# Altium PCB snowflake_r2.PcbDoc (part 1 of 2)
Units mm, origin at the board's own origin, x right, y up, seen from the top; angles counter-clockwise.
Board outline 80 x 69.28 mm, 2 copper layers (Component Side, Bottom Layer), stack 1.554 mm thick; 100 components, 57 nets, 399 pads, 234 vias.
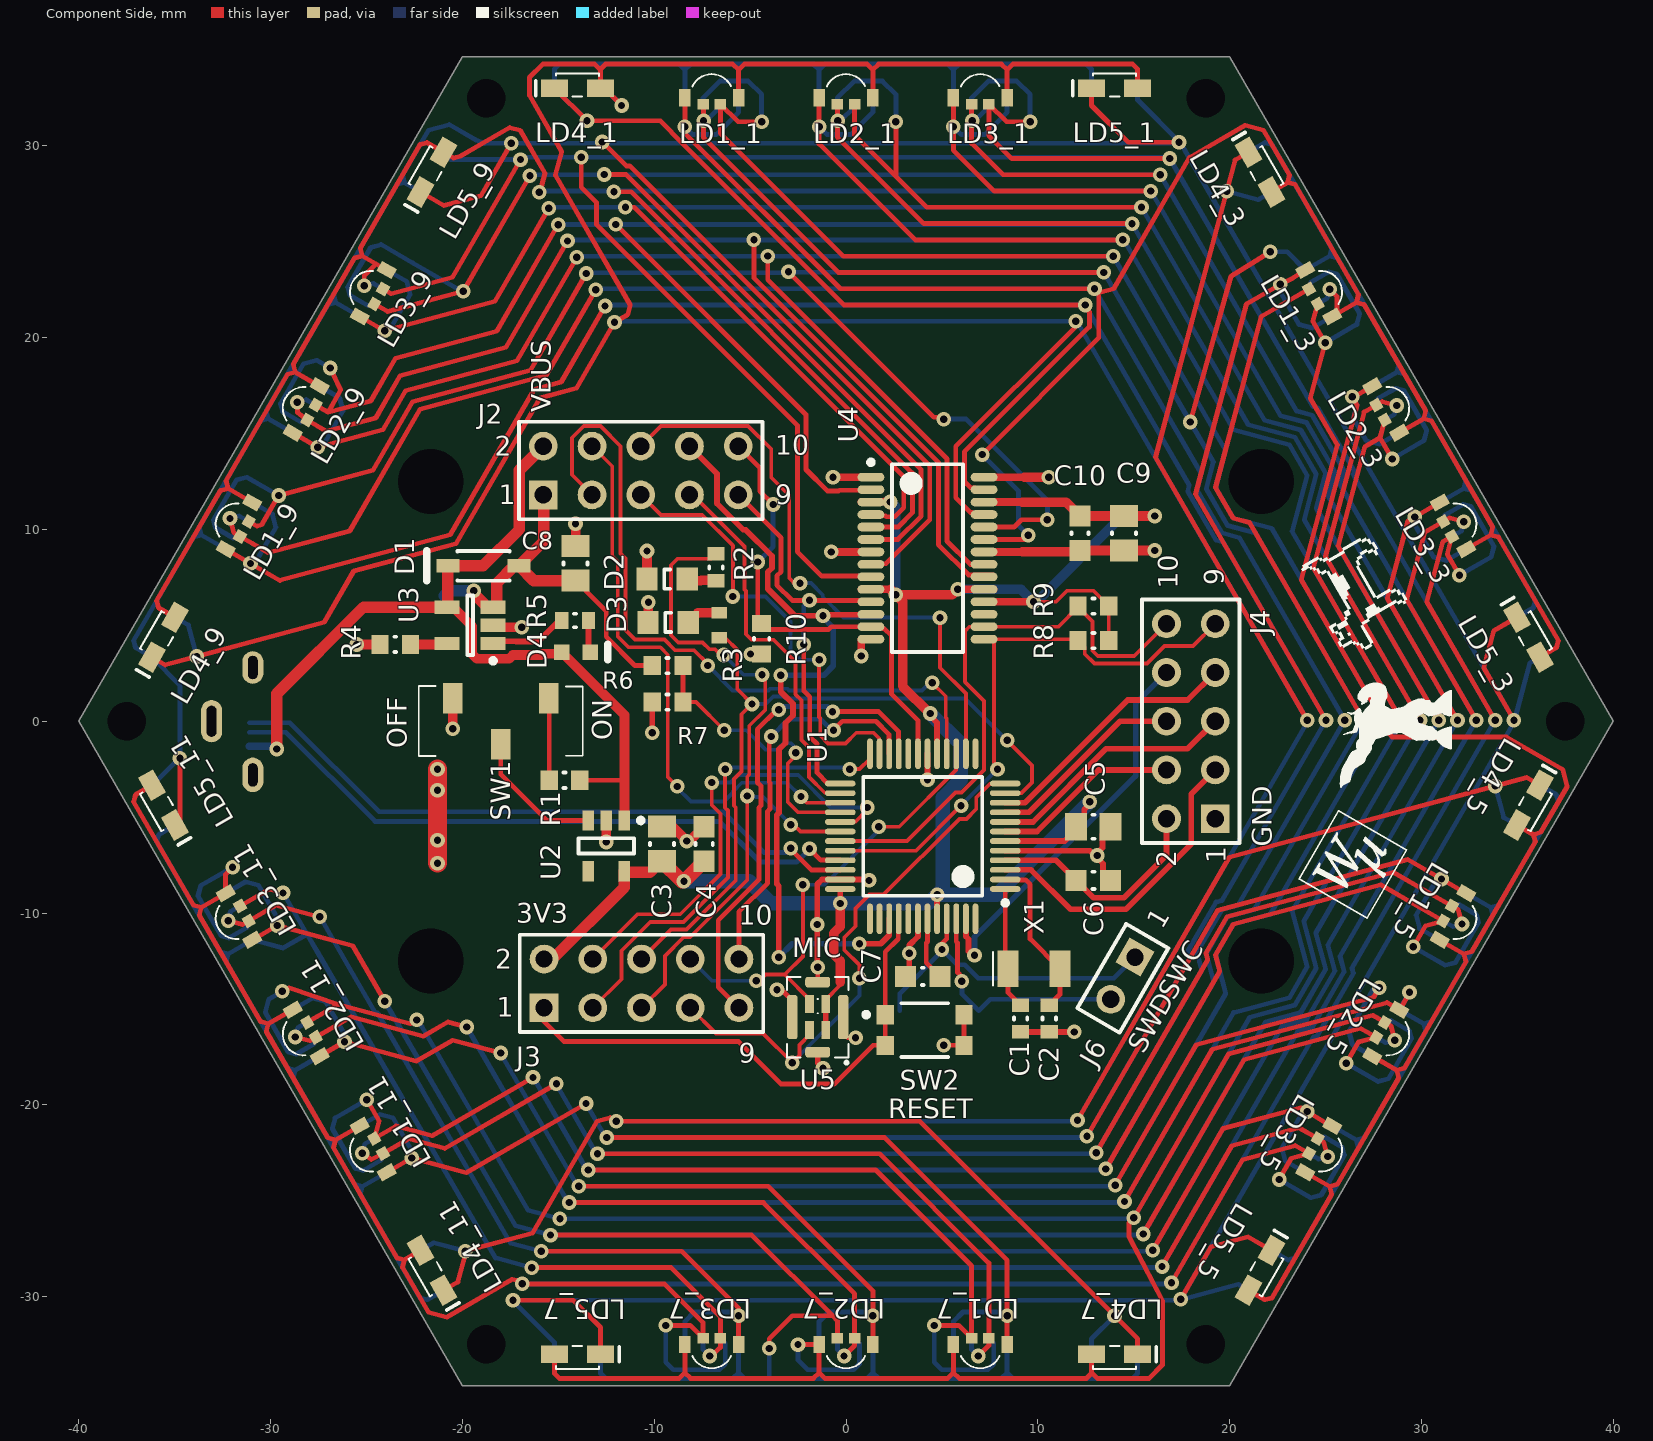
[diagram p0: Component Side view]
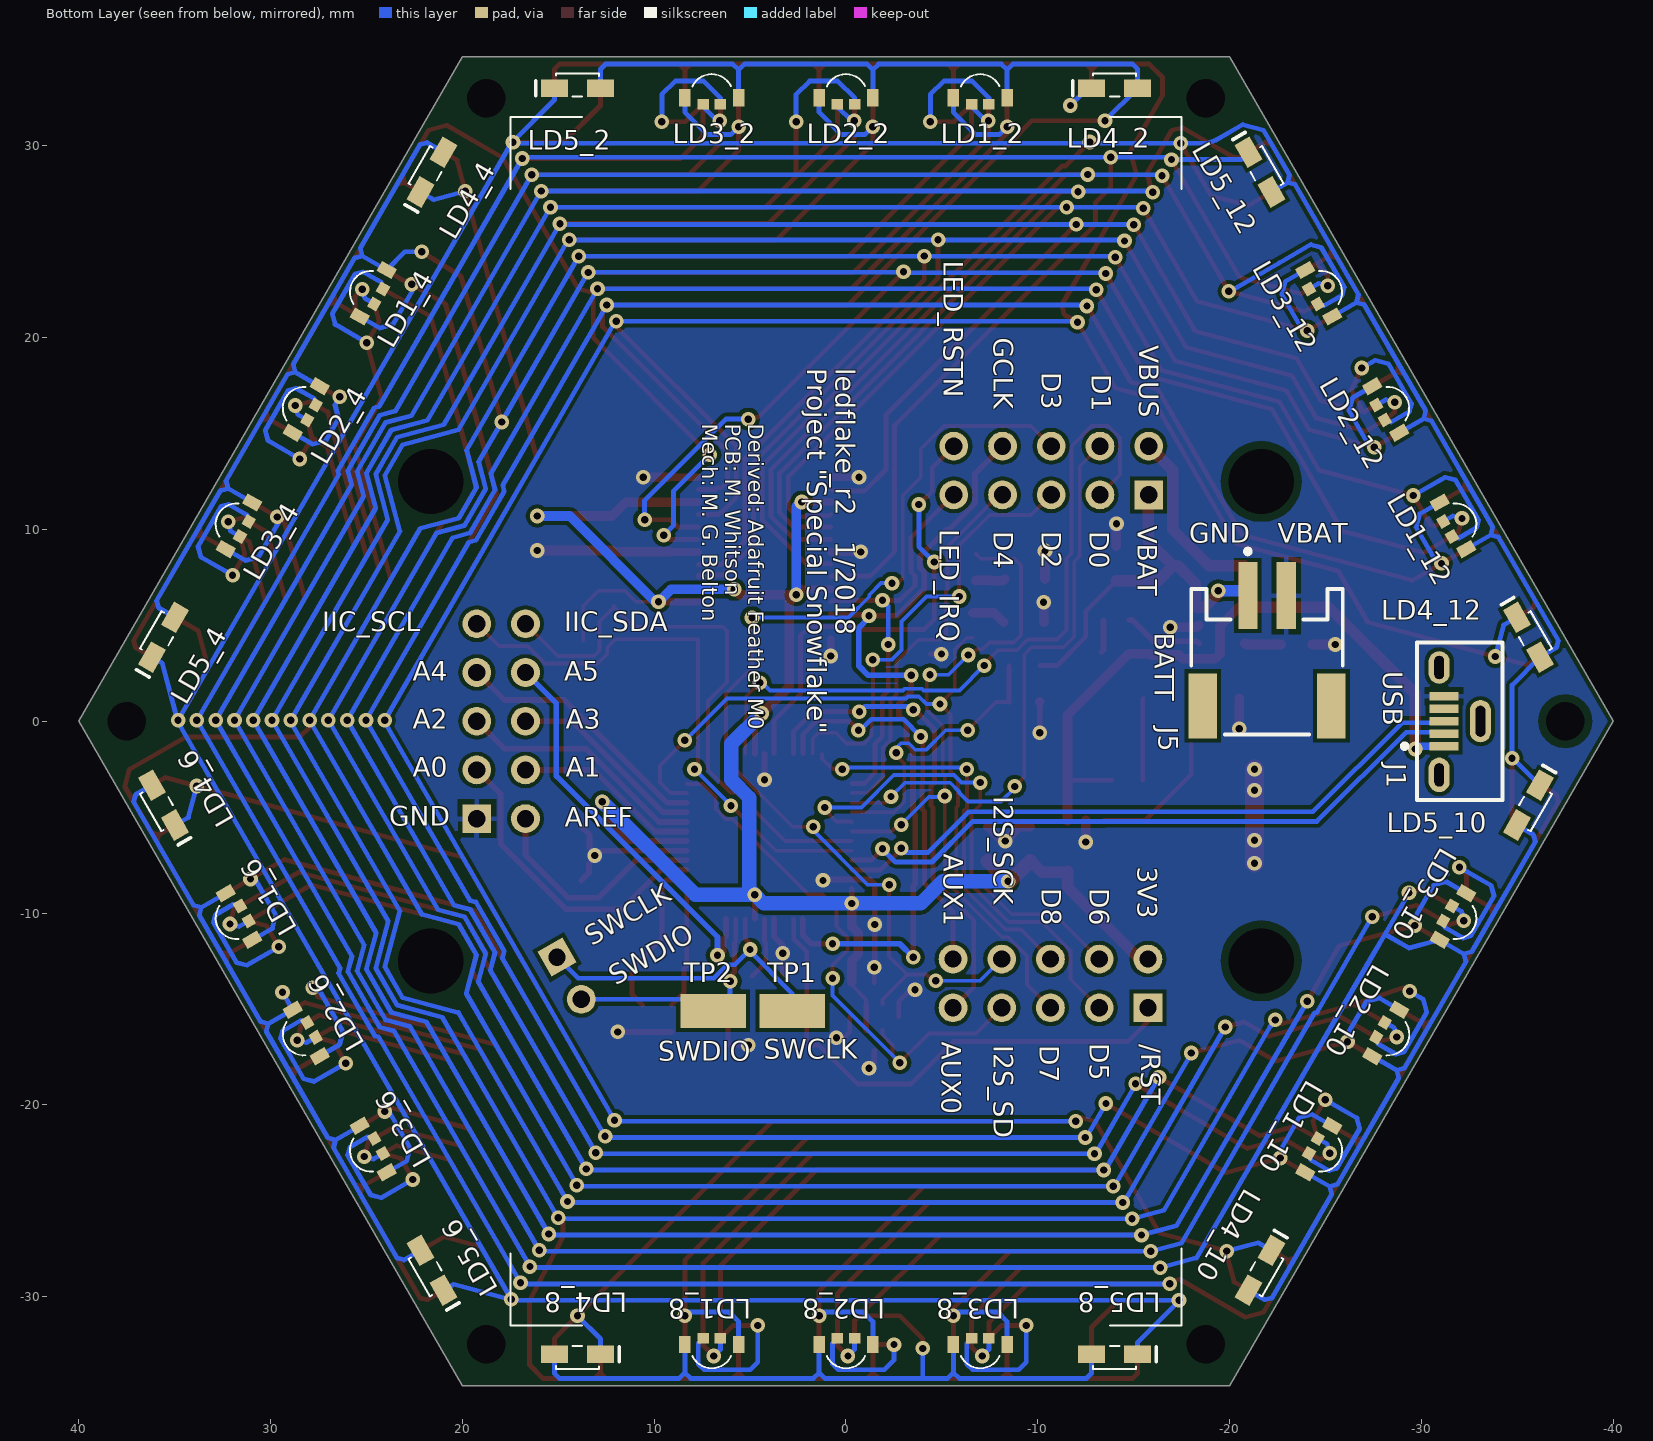
[diagram p1: Bottom Layer view, seen from below]
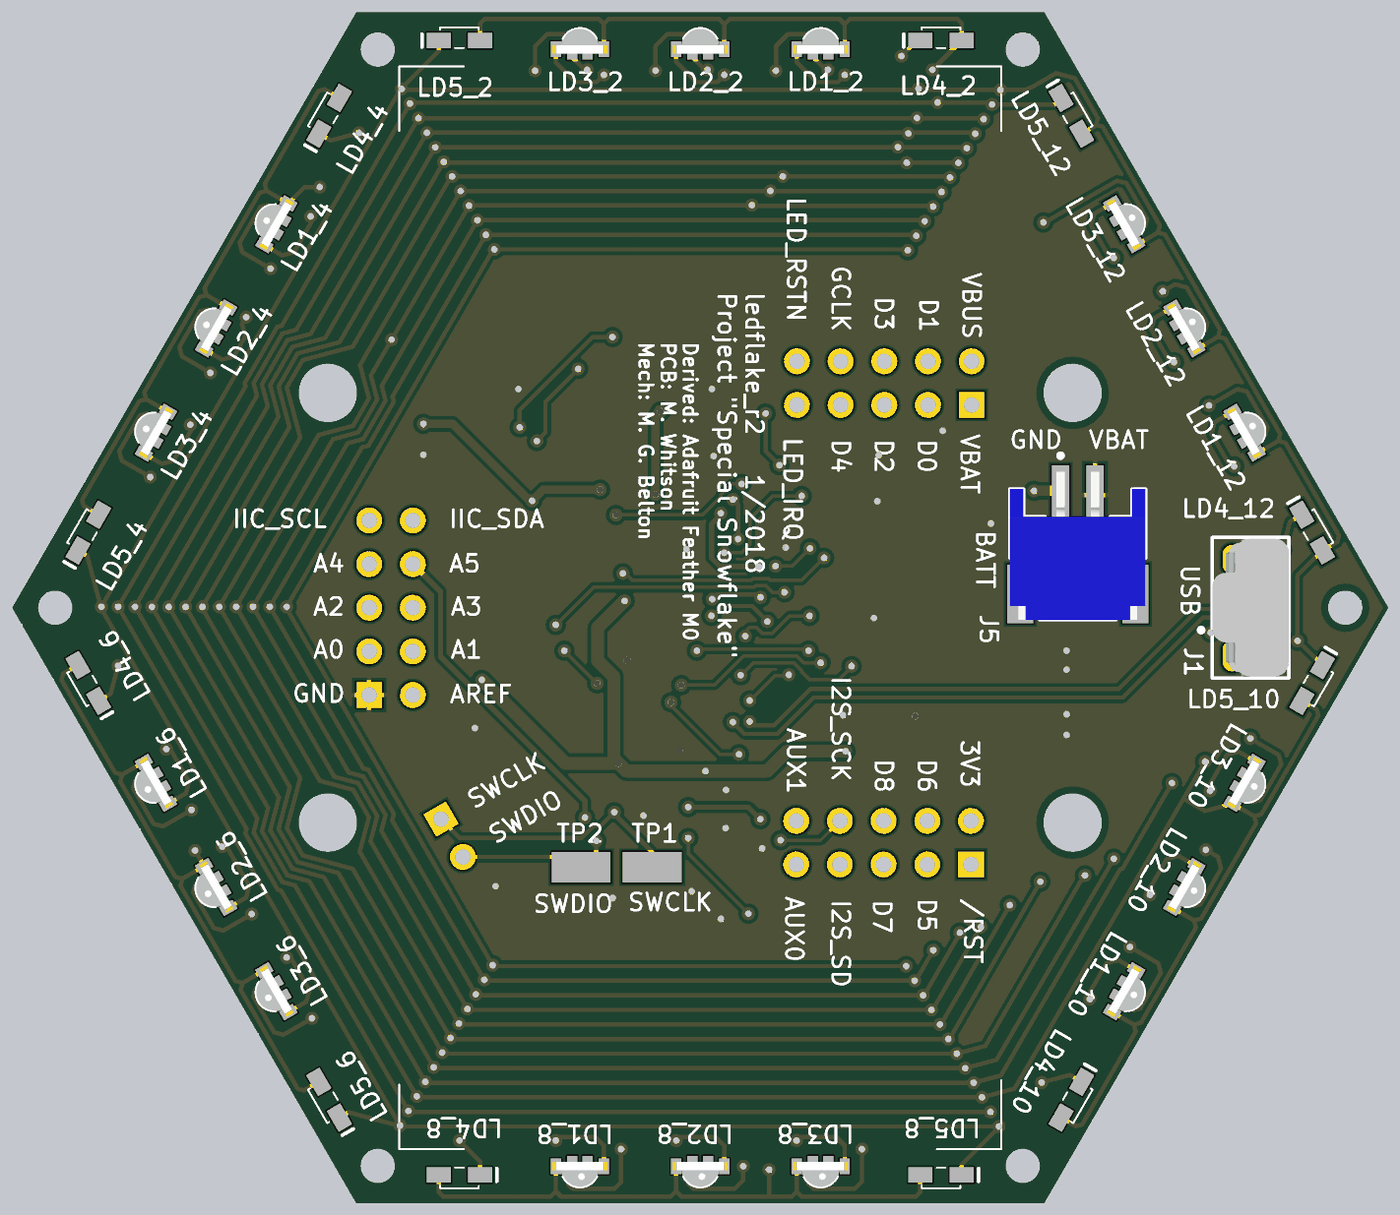
[diagram p3: 3D render of the assembled board from below, using the file's embedded part models]

## Layer stack, top to bottom
Top Solder: solder mask 0.0102, Solder Resist, Dk 3.5
Component Side: signal copper 0.0356
Dielectric 1: core 1.4834, FR-4, Dk 4.2
Bottom Layer: signal copper 0.0356
Solder Side: solder mask 0.0102, Solder Resist, Dk 3.5

## Board outline
-40,0 -20,-34.641 20,-34.641 40,0 20,34.641 -20,34.641

## Design rules (kind name [scope] priority, off if disabled: settings)
BoardOutlineClearance [All] p1: gap=0.25 ignorepadtopadclearanceinfootprint=FALSE except(0: Arc-SplitContinuation Track-SplitContinuation SMDPad-SplitContinuation THPad-SplitContinuation Via-SplitContinuation Fill-SplitContinuation Poly-SplitContinuation Region-SplitContinuation Text-SplitContinuation)
Clearance [All] p1: gap=0.2 ignorepadtopadclearanceinfootprint=FALSE except(0.4: Arc-Hole Track-Hole SMDPad-Hole THPad-Hole Via-Hole Fill-Hole Poly-Hole Region-Hole Text-Hole)
ComponentClearance [All] p1 off: gap=0.254 collisioncheckmode=3 verticalgap=0.254 showdistances=TRUE
DiffPairsRouting [All] p1: maxlimit=0.5 minlimit=0.25 mostfreqgap=0.25 toplayer_minwidth=0.25 toplayer_maxwidth=0.5 toplayer_prefwidth=0.25 bottomlayer_minwidth=0.25 bottomlayer_maxwidth=0.5 bottomlayer_prefwidth=0.25 maxuncoupledlength=12.5
HoleSize [All] p1: absolutevalues=TRUE maxlimit=3.5 minlimit=0.025 maxpercent=80.000 minpercent=20.000
PolygonConnect [All] p1: thpad.connectstyle=Relief thpad.reliefconductorwidth=0.254 thpad.reliefentries=4 thpad.polygonreliefangle="90 Angle" thpad.airgapwidth=0.254 smdpad.connectstyle=Relief smdpad.reliefconductorwidth=0.254 smdpad.reliefentries=4 smdpad.polygonreliefangle="90 Angle" smdpad.airgapwidth=0.254 via.connectstyle=Direct via.reliefconductorwidth=0.254 via.reliefentries=4 via.polygonreliefangle="90 Angle" via.airgapwidth=0.254
RoomDefinition L1 [InComponentClass('L1')] p1: confinementstyle=ConfineIn formatcopy=TRUE lockcomponents=FALSE outline -20,34.641 -16.25,28.146 16.25,28.146 20,34.641 -20,34.641
RoomDefinition L12 [InComponentClass('L12')] p2: confinementstyle=ConfineIn formatcopy=TRUE lockcomponents=FALSE outline -20,34.641 -16.25,28.146 -32.5,0 -40,0 -20,34.641
RoomDefinition L7 [InComponentClass('L7')] p3: confinementstyle=ConfineIn formatcopy=FALSE lockcomponents=FALSE outline 20,-34.641 16.25,-28.146 -16.25,-28.146 -20,-34.641 20,-34.641
RoomDefinition L10 [InComponentClass('L10')] p4: confinementstyle=ConfineIn formatcopy=TRUE lockcomponents=FALSE outline -40,0 -32.5,0 -16.25,-28.146 -20,-34.641 -40,0
RoomDefinition L8 [InComponentClass('L8')] p5: confinementstyle=ConfineIn formatcopy=FALSE lockcomponents=FALSE outline -20,-34.641 -16.25,-28.146 16.25,-28.146 20,-34.641 -20,-34.641
RoomDefinition L6 [InComponentClass('L6')] p6: confinementstyle=ConfineIn formatcopy=FALSE lockcomponents=FALSE outline 20,-34.641 16.25,-28.146 32.5,0 40,0 20,-34.641
RoomDefinition L4 [InComponentClass('L4')] p7: confinementstyle=ConfineIn formatcopy=FALSE lockcomponents=FALSE outline 40,0 32.5,0 16.25,28.146 20,34.641 40,0
RoomDefinition L2 [InComponentClass('L2')] p8: confinementstyle=ConfineIn formatcopy=FALSE lockcomponents=FALSE outline 20,34.641 16.25,28.146 -16.25,28.146 -20,34.641 20,34.641
RoomDefinition L11 [InComponentClass('L11')] p9: confinementstyle=ConfineIn formatcopy=FALSE lockcomponents=FALSE outline -20,-34.641 -16.25,-28.146 -32.5,0 -40,0 -20,-34.641
RoomDefinition L9 [InComponentClass('L9')] p10: confinementstyle=ConfineIn formatcopy=FALSE lockcomponents=FALSE outline -40,0 -32.5,0 -16.25,28.146 -20,34.641 -40,0
RoomDefinition L5 [InComponentClass('L5')] p11: confinementstyle=ConfineIn formatcopy=FALSE lockcomponents=FALSE outline 40,0 32.5,0 16.25,-28.146 20,-34.641 40,0
RoomDefinition L3 [InComponentClass('L3')] p12: confinementstyle=ConfineIn formatcopy=FALSE lockcomponents=FALSE outline 20,34.641 16.25,28.146 32.5,0 40,0 20,34.641
RoutingPriority RoutingPriority_PWR [InNetClass('PWR')] p1: routingpriority=10
RoutingPriority RoutingPriority_CS [InNetClass('CS')] p2: routingpriority=13
RoutingPriority [All] p3: routingpriority=0
RoutingTopology RoutingTopology_1 [InNetClass('CS')] p1: topology=Shortest
RoutingTopology [All] p2: topology=Shortest
RoutingVias [All] p1: holewidth=0.381 width=0.762 viastyle="Through Hole" minholewidth=0.381 minwidth=0.762 maxholewidth=3.175 maxwidth=6.35
SMDNeckDown [All] p1 off: percent=100.000
SilkToSolderMaskClearance [IsPad] p1: minsilkscreentomaskgap=0.12 clearancetoexposedcopper=TRUE
SolderMaskExpansion [All] p1: expansion=0.102
Width Width_PWR [InNetClass('PWR')] p1: maxlimit=1 minlimit=0.2 preferedwidth=0.5
Width Width_CS [InNetClass('CS')] p2: maxlimit=1 minlimit=0.2 preferedwidth=0.2
Width [All] p3: maxlimit=3 minlimit=0.2 preferedwidth=0.2 minimp=50.000000 maximp=50.000000 favimp=50.000000
24 further rules are at their usual default settings.

## Classes and differential pairs
net class CS: CS0 CS1 CS2 CS3 CS4 CS5 CS6 CS7 CS8 CS9 CS10 CS11
net class PWR: 3V3 GND VBUS
component class L12: LD1_12 LD2_12 LD3_12 LD4_12 LD5_12
channel class LED_1edge: L1 L2 L3 L4 L5 L6 L7 L8 L9 L10 L11 L12
net class CS[0..11]: CS0 CS1 CS2 CS3 CS4 CS5 CS6 CS7 CS8 CS9 CS10 CS11
component class L11: LD1_11 LD2_11 LD3_11 LD4_11 LD5_11
component class L10: LD1_10 LD2_10 LD3_10 LD4_10 LD5_10
component class L9: LD1_9 LD2_9 LD3_9 LD4_9 LD5_9
component class L8: LD1_8 LD2_8 LD3_8 LD4_8 LD5_8
component class L7: LD1_7 LD2_7 LD3_7 LD4_7 LD5_7
component class L6: LD1_6 LD2_6 LD3_6 LD4_6 LD5_6
component class L5: LD1_5 LD2_5 LD3_5 LD4_5 LD5_5
component class L4: LD1_4 LD2_4 LD3_4 LD4_4 LD5_4
component class L3: LD1_3 LD2_3 LD3_3 LD4_3 LD5_3
component class L2: LD1_2 LD2_2 LD3_2 LD4_2 LD5_2
component class L1: LD1_1 LD2_1 LD3_1 LD4_1 LD5_1
component class snowflake_r2: C1 C2 C3 C4 C5 C6 C7 C8 C9 C10 D1 D2 D3 D4 J1 J2 J3 J4 J5 J6 R1 R2 R3 R4 R5 R6 R7 R8 R9 R10 SW1 SW2 TP1 TP2 U1 U2 U3 U4 U5 X1
differential pair USB_D: +USB_D_P -USB_D_N

## Components (designator, comment, footprint, x,y, rotation, side; value= is the part's Value field where it differs from the comment)
C1 "22pF" CAPC0603(1608)100_L 9.1,-15.5 r90 top
C2 "22pF" CAPC0603(1608)100_L 10.6,-15.5 r90 top
C3 "CAP 10uF 25V 0805(2012)" CAPC0805(2012)145_N -9.6,-6.4 r270 top value=10uF
C4 "CAP 1uF 25V 0603(1608)" CAPC0603(1608)100_M -7.4,-6.4 r270 top value=1uF
C5 "CAP 10uF 25V 0805(2012)" CAPC0805(2012)145_N 12.9,-5.5 r180 top value=10uF
C6 "CAP 1uF 25V 0603(1608)" CAPC0603(1608)100_M 12.9,-8.3 r180 top value=1uF
C7 "CAP 1uF 25V 0603(1608)" CAPC0603(1608)100_M 4,-13.3 r0 top value=1uF
C8 "CAP 10uF 25V 0805(2012)" CAPC0805(2012)145_N -14.1,8.225 r270 top value=10uF
C9 "CAP 10uF 25V 0805(2012)" CAPC0805(2012)145_N 14.5,9.8 r90 top value=10uF
C10 "CAP 1uF 25V 0603(1608)" CAPC0603(1608)100_M 12.2,9.8 r90 top value=1uF
D1 "B0530W-7-F" DIOD-SOD-123-2-A_V -18.9,8.1 r180 top
D2 "150080GS75000" 0805_A -9.324,7.404 r0 top
D3 "150080SS75000" 0805_A -9.274,5.154 r0 top
D4 "LTST-C190KFKT" LTST-C190KFKT_V -14.075,3.6 r0 top
J1 "1051330011" MOLX-1051330011-5_V -32,0 r90 bottom
J2 "Header 5X2" HDR2X5 -15.78,11.8 r0 top
J3 "Header 5X2" HDR2X5 -15.74,-14.94 r0 top
J4 "Header 5X2" HDR2X5 19.25,-5.08 r90 top
J5 "S2B-PH-SM4-TB(LF)(SN)" "JST- S2B-PH-SM4-TB(LF)(SN)-2_V" -21.95,3.1 r180 bottom
J6 "Header 2" HDR1X2 15.07,-12.3 r240 top
LD1_1 "155124M173200" WL-SFSW_1204 -7,33 r180 top (schematic designator LD1)
LD1_2 "155124M173200" WL-SFSW_1204 -7,33 r0 bottom (schematic designator LD1)
LD1_3 "155124M173200" WL-SFSW_1204 25.079,22.562 r120 top (schematic designator LD1)
LD1_4 "155124M173200" WL-SFSW_1204 25.079,22.562 r300 bottom (schematic designator LD1)
LD1_5 "155124M173200" WL-SFSW_1204 32.079,-10.438 r60 top (schematic designator LD1)
LD1_6 "155124M173200" WL-SFSW_1204 32.079,-10.438 r240 bottom (schematic designator LD1)
LD1_7 "155124M173200" WL-SFSW_1204 7,-33 r0 top (schematic designator LD1)
LD1_8 "155124M173200" WL-SFSW_1204 7,-33 r180 bottom (schematic designator LD1)
LD1_9 "155124M173200" WL-SFSW_1204 -32.079,10.438 r240 top (schematic designator LD1)
LD1_10 "155124M173200" WL-SFSW_1204 -25.079,-22.562 r120 bottom (schematic designator LD1)
LD1_11 "155124M173200" WL-SFSW_1204 -25.079,-22.562 r300 top (schematic designator LD1)
LD1_12 "155124M173200" WL-SFSW_1204 -32.079,10.438 r60 bottom (schematic designator LD1)
LD2_1 "155124M173200" WL-SFSW_1204 0,33 r180 top (schematic designator LD2)
LD2_2 "155124M173200" WL-SFSW_1204 0,33 r0 bottom (schematic designator LD2)
LD2_3 "155124M173200" WL-SFSW_1204 28.579,16.5 r120 top (schematic designator LD2)
LD2_4 "155124M173200" WL-SFSW_1204 28.579,16.5 r300 bottom (schematic designator LD2)
LD2_5 "155124M173200" WL-SFSW_1204 28.579,-16.5 r60 top (schematic designator LD2)
LD2_6 "155124M173200" WL-SFSW_1204 28.579,-16.5 r240 bottom (schematic designator LD2)
LD2_7 "155124M173200" WL-SFSW_1204 0,-33 r0 top (schematic designator LD2)
LD2_8 "155124M173200" WL-SFSW_1204 0,-33 r180 bottom (schematic designator LD2)
LD2_9 "155124M173200" WL-SFSW_1204 -28.579,16.5 r240 top (schematic designator LD2)
LD2_10 "155124M173200" WL-SFSW_1204 -28.579,-16.5 r120 bottom (schematic designator LD2)
LD2_11 "155124M173200" WL-SFSW_1204 -28.579,-16.5 r300 top (schematic designator LD2)
LD2_12 "155124M173200" WL-SFSW_1204 -28.579,16.5 r60 bottom (schematic designator LD2)
LD3_1 "155124M173200" WL-SFSW_1204 7,33 r180 top (schematic designator LD3)
LD3_2 "155124M173200" WL-SFSW_1204 7,33 r0 bottom (schematic designator LD3)
LD3_3 "155124M173200" WL-SFSW_1204 32.079,10.438 r120 top (schematic designator LD3)
LD3_4 "155124M173200" WL-SFSW_1204 32.079,10.438 r300 bottom (schematic designator LD3)
LD3_5 "155124M173200" WL-SFSW_1204 25.079,-22.562 r60 top (schematic designator LD3)
LD3_6 "155124M173200" WL-SFSW_1204 25.079,-22.562 r240 bottom (schematic designator LD3)
LD3_7 "155124M173200" WL-SFSW_1204 -7,-33 r0 top (schematic designator LD3)
LD3_8 "155124M173200" WL-SFSW_1204 -7,-33 r180 bottom (schematic designator LD3)
LD3_9 "155124M173200" WL-SFSW_1204 -25.079,22.562 r240 top (schematic designator LD3)
LD3_10 "155124M173200" WL-SFSW_1204 -32.079,-10.438 r120 bottom (schematic designator LD3)
LD3_11 "155124M173200" WL-SFSW_1204 -32.079,-10.438 r300 top (schematic designator LD3)
LD3_12 "155124M173200" WL-SFSW_1204 -25.079,22.562 r60 bottom (schematic designator LD3)
LD4_1 "LTW-008ZDCG" LTW-008ZDCG -14,33 r180 top (schematic designator LD4)
LD4_2 "LTW-008ZDCG" LTW-008ZDCG -14,33 r0 bottom (schematic designator LD4)
LD4_3 "LTW-008ZDCG" LTW-008ZDCG 21.579,28.624 r120 top (schematic designator LD4)
LD4_4 "LTW-008ZDCG" LTW-008ZDCG 21.579,28.624 r300 bottom (schematic designator LD4)
LD4_5 "LTW-008ZDCG" LTW-008ZDCG 35.579,-4.376 r60 top (schematic designator LD4)
LD4_6 "LTW-008ZDCG" LTW-008ZDCG 35.579,-4.376 r240 bottom (schematic designator LD4)
LD4_7 "LTW-008ZDCG" LTW-008ZDCG 14,-33 r0 top (schematic designator LD4)
LD4_8 "LTW-008ZDCG" LTW-008ZDCG 14,-33 r180 bottom (schematic designator LD4)
LD4_9 "LTW-008ZDCG" LTW-008ZDCG -35.579,4.376 r240 top (schematic designator LD4)
LD4_10 "LTW-008ZDCG" LTW-008ZDCG -21.579,-28.624 r120 bottom (schematic designator LD4)
LD4_11 "LTW-008ZDCG" LTW-008ZDCG -21.579,-28.624 r300 top (schematic designator LD4)
LD4_12 "LTW-008ZDCG" LTW-008ZDCG -35.579,4.376 r60 bottom (schematic designator LD4)
LD5_1 "LTW-008ZDCG" LTW-008ZDCG 14,33 r180 top (schematic designator LD5)
LD5_2 "LTW-008ZDCG" LTW-008ZDCG 14,33 r0 bottom (schematic designator LD5)
LD5_3 "LTW-008ZDCG" LTW-008ZDCG 35.579,4.376 r120 top (schematic designator LD5)
LD5_4 "LTW-008ZDCG" LTW-008ZDCG 35.579,4.376 r300 bottom (schematic designator LD5)
LD5_5 "LTW-008ZDCG" LTW-008ZDCG 21.579,-28.624 r60 top (schematic designator LD5)
LD5_6 "LTW-008ZDCG" LTW-008ZDCG 21.579,-28.624 r240 bottom (schematic designator LD5)
LD5_7 "LTW-008ZDCG" LTW-008ZDCG -14,-33 r0 top (schematic designator LD5)
LD5_8 "LTW-008ZDCG" LTW-008ZDCG -14,-33 r180 bottom (schematic designator LD5)
LD5_9 "LTW-008ZDCG" LTW-008ZDCG -21.579,28.624 r240 top (schematic designator LD5)
LD5_10 "LTW-008ZDCG" LTW-008ZDCG -35.579,-4.376 r120 bottom (schematic designator LD5)
LD5_11 "LTW-008ZDCG" LTW-008ZDCG -35.579,-4.376 r300 top (schematic designator LD5)
LD5_12 "LTW-008ZDCG" LTW-008ZDCG -21.579,28.624 r60 bottom (schematic designator LD5)
R1 "100K 5%" RESC0603(1608)_N -14.675,-3.075 r0 top value="100000.00 Ohm"
R2 "1K 5% 0603(1608)" RESC0603(1608)_L -6.777,8.02 r90 top value="1000.00 Ohm"
R3 "RC0603JR-072K2L" RESC1608X55X25LL10T15 -6.6,5 r270 top
R4 "10K 5% 0603(1608)" RESC0603(1608)_N -23.5,4 r0 top value="10000.00 Ohm"
R5 "1K 5% 0603(1608)" RESC0603(1608)_L -14.125,5.25 r0 top value="1000.00 Ohm"
R6 "100K 5% 0603(1608)" RESC0603(1608)_N -9.3,2.9 r180 top value="100000.00 Ohm"
R7 "100K 5% 0603(1608)" RESC0603(1608)_N -9.3,1 r0 top value="100000.00 Ohm"
R8 "4K7 5% 0603(1608)" RESC0603(1608)_N 12.9,4.2 r0 top value="4700.00 Ohm"
R9 "4K7 5% 0603(1608)" RESC0603(1608)_N 12.9,6 r0 top value="4700.00 Ohm"
R10 "4K7 5% 0603(1608)" RESC0603(1608)_N -4.4,4.3 r90 top value="4700.00 Ohm"
SW1 "JS102011JCQN" JS102011JCQN -18,0 r180 top
SW2 "KMR231GLFS" CKCP-KMR231GLFS 4.1,-16.1 r0 top
TP1 "5015" KSTN-5015_V 2.8,-15.1 r180 bottom
TP2 "5015" KSTN-5015_V 6.925,-15.1 r180 bottom
U1 "ATSAMD21G18A-AU" ATML-TQFP48_M 4,-6 r180 top
U2 "SPX3819M5" SOT95P280X145-5N -12.5,-6.5 r270 top
U3 "MCP73831T-2ACI/OT" SOT-23-OT5_M -19.6,5 r180 top
U4 "AS1130_BTST" TSOP65P640X120-28N 4.25,8.5 r0 top
U5 "SPK0415HM4H-B-7" SPK0415HM4H-B-7 -1.475,-15.425 r0 top
X1 "ECS-.327-12.5-34B" ECX-31B 9.8,-12.9 r0 top

## Footprints (in the part's own frame and the unit in brackets; to place one, negate y for a bottom-side part, rotate by r counter-clockwise, add the part's x,y. Pads: shape width x height; smd on the part's side, far side on the other; paste and mask are expansions set on the pad)
0805_A [mm] "Chip LED, 2-Leads, Body 2.0x1.3mm, IPC Medium Density"
  rect 1.1x1.2 smd: 1(-1.05,0) 2(1.05,0)
  silkscreen extent -0.15,-0.5 0.15,0.5, body extent -1,-0.62 1,0.63, height 0.68
ATML-TQFP48_M [mm] "QFP, 48-Leads, Body 7x7mm, Pitch 0.5mm, IPC Low Density"
  oval 1.6x0.3 smd: 1(-4.3,2.75) 2(-4.3,2.25) 3(-4.3,1.75) 4(-4.3,1.25) 5(-4.3,0.75) 6(-4.3,0.25) 7(-4.3,-0.25) 8(-4.3,-0.75) 9(-4.3,-1.25) 10(-4.3,-1.75) 11(-4.3,-2.25) 12(-4.3,-2.75) 25(4.3,-2.75) 26(4.3,-2.25) 27(4.3,-1.75) 28(4.3,-1.25) 29(4.3,-0.75) 30(4.3,-0.25) 31(4.3,0.25) 32(4.3,0.75) 33(4.3,1.25) 34(4.3,1.75) 35(4.3,2.25) 36(4.3,2.75)
  oval 0.3x1.6 smd: 13(-2.75,-4.3) 14(-2.25,-4.3) 15(-1.75,-4.3) 16(-1.25,-4.3) 17(-0.75,-4.3) 18(-0.25,-4.3) 19(0.25,-4.3) 20(0.75,-4.3) 21(1.25,-4.3) 22(1.75,-4.3) 23(2.25,-4.3) 24(2.75,-4.3) 37(2.75,4.3) 38(2.25,4.3) 39(1.75,4.3) 40(1.25,4.3) 41(0.75,4.3) 42(0.25,4.3) 43(-0.25,4.3) 44(-0.75,4.3) 45(-1.25,4.3) 46(-1.75,4.3) 47(-2.25,4.3) 48(-2.75,4.3)
  silkscreen extent -4.42,-3.1 3.1,3.6, body extent -4.5,-4.5 4.5,4.5, height 1.2
CAPC0603(1608)100_L [mm]
  rect 0.7x0.9 smd: 1(-0.7,0) 2(0.7,0)
  silkscreen extent -0.05,-0.35 0.05,0.35, body extent -0.87,-0.47 0.88,0.48, height 1
CAPC0603(1608)100_M [mm] "Chip Capacitor, Body 1.6x0.8mm, Height 1.0mm, IPC Low Density"
  rect 1.1x1.1 smd: 1(-0.9,0) 2(0.9,0)
  silkscreen extent -0.05,-0.45 0.05,0.45, body extent -0.87,-0.48 0.88,0.48, height 1
CAPC0805(2012)145_N [mm] "Chip Capacitor, Body 2.0x1.2mm, Height 1.45mm, IPC Medium Density"
  rect 1.15x1.45 smd: 1(-0.9,0) 2(0.9,0)
  silkscreen extent -0.05,-0.63 0.05,0.62, body extent -1.1,-0.73 1.1,0.73, height 1.45
CKCP-KMR231GLFS [mm] "SMD, 4-Leads, Body 4.6x2.8mm"
  rect 0.9x1 smd: 1(-2.05,0.8) 2(-2.05,-0.8) 3(2.05,0.8) 4(2.05,-0.8)
  silkscreen extent -3.17,-1.4 1.21,1.4, body extent -2.3,-1.4 2.3,1.4, height 1.92
DIOD-SOD-123-2-A_V [mm] "SOD-123, 2-Leads, Body 2.7x1.55mm"
  rect 1.2x0.7 smd paste+0: 1(-1.85,0) 2(1.85,0)
  silkscreen extent -1.35,-0.78 2.95,0.78, body extent -1.35,-0.77 1.35,0.78, height 1.45
ECX-31B [mm] "XTAL SMD"
  rect 1.1x1.9 smd: 1(-1.35,0) 2(1.35,0)
  silkscreen extent -2.13,-0.87 -2.13,0.88, body extent -1.6,-0.75 1.6,0.75, height 0.9
HDR1X2 [mm] "Connector; Header; 2 Position"
  rect 1.5x1.5 hole 0.9: 1(0,0)
  round 1.5 hole 0.9: 2(2.54,0)
  silkscreen extent -1.27,-1.27 3.81,1.27
HDR2X5 [mm] "Connector; Header; 5x2 Position"
  rect 1.5x1.5 hole 0.9: 1(0,0)
  round 1.5 hole 0.9: 2(0,2.54) 3(2.54,0) 4(2.54,2.54) 5(5.08,0) 6(5.08,2.54) 7(7.62,0) 8(7.62,2.54) 9(10.16,0) 10(10.16,2.54)
  silkscreen extent -1.27,-1.27 11.43,3.81
JS102011JCQN [mm] "SWITCH SLIDE SPDT 300MA 6V"
  rect 1x1.6 smd: 1(-2.5,-1.2) 2(0,1.2) 3(2.5,-1.2)
  silkscreen extent -4.28,-1.83 4.28,1.83, body extent -4.25,-1.8 4.25,1.8, height 5.5
"JST- S2B-PH-SM4-TB(LF)(SN)-2_V" [mm] "SMD, 2-Leads, Body 7.9x7.6mm, Pitch 2mm"
  rect 1x3.5 smd: 1(-1,3.45) 2(1,3.45)
  rect 1.5x3.4 smd: MP1(-3.35,-2.3) MP2(3.35,-2.3)
  silkscreen extent -3.95,-3.8 3.95,5.87, body extent -3.95,-3.8 3.95,4.8, height 5.6
KSTN-5015_V [mm] "SMD, Body 2.63x1.02mm"
  rect 3.43x1.78 smd: 1(0,0)
  body extent -1.53,-0.51 1.53,0.49, height 1.49
LTST-C190KFKT_V [mm] "SMD, 2-Leads, Body 1.6x0.8mm"
  rect 0.8x0.8 smd: 1(-0.75,0) 2(0.75,0)
  silkscreen extent 1.65,-0.4 1.65,0.4, body extent -0.8,-0.4 0.8,0.4, height 0.9
LTW-008ZDCG [mm] "LED WHITE 2SMD R/A"
  rect 1.4x0.9 smd: 1(1.2,0) 2(-1.2,0)
  silkscreen extent -1.13,-0.77 2.17,0.43, body extent -1.2,-0.78 1.2,0.43, height 0.68
MOLX-1051330011-5_V [mm] "Micro-B USB, 5-Leads, Body 8x4.45mm, Pitch 0.65mm"
  rect 0.45x1.5 smd: 1(-1.3,0.825) 2(-0.65,0.825) 3(0,0.825) 4(0.65,0.825) 5(1.3,0.825)
  oval 1.8x1.1 hole 0.5 slot 1.2 at 0 deg: 6(-2.8,1.075)
  oval 1.7x1.1 hole 0.5 slot 1.2 at 0 deg: 7(2.8,1.075)
  oval 2.2x1.1 hole 0.5 slot 1.6 at 0 deg: 8(0,-1.075)
  silkscreen extent -4.1,-2.22 4.1,3, body extent -4.01,-2.22 4.01,2.23, height 7.5
RESC0603(1608)_L [mm] "Chip Resistor, Body 1.6x0.8mm, IPC High Density"
  rect 0.7x0.9 smd: 1(-0.7,0) 2(0.7,0)
  silkscreen extent -0.05,-0.35 0.05,0.35, body extent -0.85,-0.47 0.85,0.47, height 0.6
RESC0603(1608)_N [mm] "Chip Resistor, Body 1.6x0.8mm, IPC Medium Density"
  rect 0.9x1 smd: 1(-0.8,0) 2(0.8,0)
  silkscreen extent -0.05,-0.4 0.05,0.4, body extent -0.85,-0.47 0.85,0.47, height 0.6
RESC1608X55X25LL10T15 [mm] "Chip Resistor, 2-Leads, Body 1.60x0.80mm, IPC High Density"
  rect 0.6x0.8 smd: 1(-0.65,0) 2(0.65,0)
  body extent -0.85,-0.45 0.85,0.45, height 0.55
SOT95P280X145-5N [mm] "SOT23, 5-Leads, Body 2.90x2.80mm, Pitch 0.95mm, IPC Medium Density"
  rect 1.05x0.6 smd: 1(-1.325,0.95) 2(-1.325,0) 3(-1.325,-0.95) 4(1.325,-0.95) 5(1.325,0.95)
  silkscreen extent -1.45,-1.45 0.4,1.93, body extent -1.4,-1.45 1.4,1.45, height 1.45
SOT-23-OT5_M [mm] "SOT23, 5-Leads, Body 2.9x1.7mm, Pitch 0.95mm, Lead Span 2.8mm, IPC Low Density"
  rect 1.3x0.7 smd: 1(-1.2,0.95) 2(-1.2,0) 3(-1.2,-0.95) 4(1.2,-0.95) 5(1.2,0.95)
  silkscreen extent -1.32,-1.55 0.15,1.97, body extent -0.9,-1.55 0.9,1.55, height 1.45
SPK0415HM4H-B-7 [mm] "MIC MEMS DIGITAL PDM OMNI -26DB"
  rect 0.45x0.95 smd: 1(0.425,-0.675) 2(0.425,0.675) 3(-0.425,0.675) 4(-0.425,-0.675)
  rrect50% 1.3x0.55 smd: 5(0,-1.825) 7(0,1.825)
  rrect50% 0.55x2.3 smd: 6(1.325,0) 8(-1.325,0)
  silkscreen extent -1.6,-2.4 1.6,2.1, body extent -1.5,-2 1.5,2, height 1.07
TSOP65P640X120-28N [mm] "TSOP, 28-Leads, Body 9.70x4.40mm, Pitch 0.65mm, IPC Medium Density"
  oval 1.4x0.45 smd: 1(-2.95,4.225) 2(-2.95,3.575) 3(-2.95,2.925) 4(-2.95,2.275) 5(-2.95,1.625) 6(-2.95,0.975) 7(-2.95,0.325) 8(-2.95,-0.325) 9(-2.95,-0.975) 10(-2.95,-1.625) 11(-2.95,-2.275) 12(-2.95,-2.925) 13(-2.95,-3.575) 14(-2.95,-4.225) 15(2.95,-4.225) 16(2.95,-3.575) 17(2.95,-2.925) 18(2.95,-2.275) 19(2.95,-1.625) 20(2.95,-0.975) 21(2.95,-0.325) 22(2.95,0.325) 23(2.95,0.975) 24(2.95,1.625) 25(2.95,2.275) 26(2.95,2.925) 27(2.95,3.575) 28(2.95,4.225)
  silkscreen extent -3.07,-4.9 1.85,5.12, body extent -3.2,-4.9 3.2,4.9, height 1.2
WL-SFSW_1204 [mm] "SMD Full-color Side view Waterclear, body 3.2x1"
  rect 0.6x0.9 smd: 1(-1.4,0.5) 4(1.4,0.5)
  rect 0.6x0.55 smd: 2(-0.45,0.825) 3(0.45,0.825)
  silkscreen extent -1,-0.74 1,-0.1, body extent -1.6,-0.72 1.6,0.77, height 1.02

## Part data
C1 C2: library part CMP-1590-00005-1, "0603 (1608 Metric) Chip Capacitor", Case-EIA=0603, Case-Metric=1608, PackageReference=CAPC0603(1608)100
C3 C5 C8 C9: library part CMP-1036-04932-1, "CAP 10uF 25V ±10% 0805 (2012 Metric) Thickness 1.45mm SMD", Case-EIA=0805, Case-Metric=2012, Rated Voltage="25 V", Tolerance=±10%, Max Thickness="1.45 mm", Technology=SMT
C4 C6 C7 C10: library part CMP-1035-02741-1, "CAP 1uF 25V ±20% 0603 (1608 Metric) Thickness 1mm SMD", Case-EIA=0603, Case-Metric=1608, Rated Voltage="25 V", Tolerance=±20%, Max Thickness="1 mm", Technology=SMT
D1: library part CMP-2000-05879-1, "Schottky Barrier Rectifier, 0.5 A, 30 V, -65 to 125 degC, 2-Pin SOD-123, RoHS, Tape and Reel", If - Forward Current=0.5A, Ifsm - Forward Surge Current=5.5A, Ir - Reverse Current=130uA, Manufacturer=DiodesIncorporated, Maximum Operating Temperature=+125C, Minimum Operating Temperature=-65C, Operating Temperature Range=-65Cto+125C, Package / Case=SOD-123, Package Description="2-Pin Small Outline Diode, Body 2.7 x 1.55 mm", Package Reference=SOD-123-2, Pd - Power Dissipation=410mW, Vf - Forward Voltage=0.43V, Vrrm - Repetitive Reverse Voltage=30V, Brand=DiodesIncorporated, Configuration=Single, Datasheet URL=http://www.diodes.com/_files/datasheets/ds30139.pdf, Datasheet Version="Rev. 9-2, 06/2008", Factory Pack Quantity=3000, Height=1.25mm, Length=2.85mm, Manufacturer URL=http://www.diodes.com/, Mounting Style=SMD/SMT, Mounting Technology=SurfaceMount, Packaging=Reel, Product=SchottkyDiodes, Product Category=SchottkyDiodes&Rectifiers, RoHS=True, Series=B0530, Technology=Si, Termination Style=SMD/SMT, Type=0.5ASurfaceMountSchottkyBarrierRectifier, Unit Weight=0.000353oz, Width=1.7mm
D2: library part CMP-1426-00007-1, "SMD mono-color Chip LED, WL-SMCW, Green", Color=Green, Manufacturer="Wuerth Elektronik", ComponentLink1Description="Manufacturer URL", ComponentLink1URL=http://www.we-online.com, ComponentLink2Description=Datasheet, ComponentLink2URL=http://katalog.we-online.com/led/datasheet/150080GS75000.pdf, PackageReference=0805_A, PartNumber=150080GS75000
D3: library part CMP-1426-00010-1, "SMD mono-color Chip LED, WL-SMCW, Super Red", Color="Super Red", Manufacturer="Wuerth Elektronik", ComponentLink1Description="Manufacturer URL", ComponentLink1URL=http://www.we-online.com, ComponentLink2Description=Datasheet, ComponentLink2URL=http://katalog.we-online.com/led/datasheet/150080SS75000.pdf, PackageReference=0805_A, PartNumber=150080SS75000
D4: library part CMP-1674-00008-1, "LED Uni-Color Orange, 75 mW, 30 mA, -35 to 85 degC, 2-Pin SMD, RoHS, Tape and Reel", Case\Package=0603, Case Code (Metric)=1608, Max Operating Temperature="155 degC", Min Operating Temperature="-55 degC", Package Quantity=5000, Power Rating="100 mW", Resistance="47 kohm", Tolerance=1%, Voltage Rating="50 V", Case Code (Imperial)=0603, ComponentLink1Description="Manufacturer URL", ComponentLink1URL=http://www.us.liteon.com/, ComponentLink2Description=Datasheet, ComponentLink2URL=http://optoelectronics.liteon.com/upload/download/DS-22-99-0186/S_110_LTST-C190KFKT.pdf, DatasheetVersion="Rev. I, 09/2011", Height="0.45 mm", Length="1.6 mm", Mount="Surface Mount", PackageDescription="2-Pin Surface Mount Device, Body 1.6 x 0.8 mm", PackageReference=C190KFKT, Packaging="Tape and Reel", Pins=2, REACH SVHC="No SVHC", RoHSCompliant=true, Voltage Rating (DC)="50 V", Width="0.8 mm"
J1: library part CMP-2000-05241-1, "Micro-B USB Vertical Type, -30 to 85 degC, 5-Pin SMD, RoHS, Tape and Reel", Manufacturer=Molex, Standard Package=500, 3D Model=105133-0011.stp, Category=Connectors,Interconnects, Connector Type=USB-microB, Datasheet URL=http://www.molex.com/pdm_docs/sd/1051330011_sd.pdf, Datasheet Version="Rev. G, 01/2011", Family=USB,DVI,HDMIConnectors, Featured Product=USBConnectors, Features=BoardGuide, Gender=Receptacle, Ingress Protection=-, Manufacturer URL=http://www.molex.com/, Mounting Type=SurfaceMountVertical, Number of Contacts=5, Online Catalog=Molex-MicroUSB, Other Names=105133-0011887191097947WM10134TR, Packaging=Tape&Reel(TR), PCN Other=105133Series21/Jul/2015, PCN Packaging=105133Series03/Oct/2015, RoHS Information=105133-0011Cert.ofCompliance, Series=105133, Specifications=-
J2 J3 J4: "Header, 5-Pin, Dual row", LatestRevisionDate=17-Jul-2002, LatestRevisionNote="Re-released for DXP Platform.", Publisher="Altium Limited"
J5: library part CMP-1755-00001-1, "Male Header, Pitch 2 mm, 1 x 2 Position, Height 5.5 mm, -25 to 85 degC, RoHS, Tape and Reel", Colour=Black, Current Rating="3 A", Max Operating Temperature=105degC, Min Operating Temperature=-65degC, Package Quantity=100, ComponentLink1Description="Manufacturer URL", ComponentLink1URL=http://www.jst.com/home2.html, ComponentLink2Description=Datasheet, ComponentLink2URL=http://www.jst-mfg.com/product/pdf/eng/ePH.pdf, Contact Finish=Lead, Contact Material=Bronze, Contact Plating=Tin, DatasheetVersion=Dec-12, Height="8.13 mm", Lead Pitch="0.1 inch", Length="101.19 mm", Mount="Through Hole", PackageDescription="Male Header, Pitch 2 mm, 1 x 2 Position, Height 5.5 mm", PackageReference=S2B-PH-SM4-TB(LF)(SN)-2, Packaging=Bulk, Pins=40, Radiation Hardening=No, RoHSCompliant=True, Width="2.34 mm"
J6: "Header, 2-Pin", LatestRevisionDate=17-Jul-2002, LatestRevisionNote="Re-released for DXP Platform.", Publisher="Altium Limited"
LD1_1 LD1_2 LD1_3 LD1_4 LD1_5 LD1_6 LD1_7 LD1_8 LD1_9 LD1_10 LD1_11 LD1_12 LD2_1 LD2_2 LD2_3 LD2_4 LD2_5 LD2_6 LD2_7 LD2_8 LD2_9 LD2_10 LD2_11 LD2_12 LD3_1 LD3_2 LD3_3 LD3_4 LD3_5 LD3_6 LD3_7 LD3_8 LD3_9 LD3_10 LD3_11 LD3_12: "WL-SFSW SMD Full-color Side view Waterclear", Emitting Color="Red & Green & Blue", ComponentLink1Description=Manufacturer, ComponentLink1URL=http://www.we-online.de, ComponentLink2Description=Datasheet, ComponentLink2URL=http://katalog.we-online.de/led/datasheet/155124M173200.pdf, Part Number=155124M173200, Published Date="Jan 2017", Publisher="Wurth Elektronik", Size=1204, Viewing Angle=120°
LD4_1 LD4_2 LD4_3 LD4_4 LD4_5 LD4_6 LD4_7 LD4_8 LD4_9 LD4_10 LD4_11 LD4_12 LD5_1 LD5_2 LD5_3 LD5_4 LD5_5 LD5_6 LD5_7 LD5_8 LD5_9 LD5_10 LD5_11 LD5_12: "LED WHITE 2SMD R/A"
R1 R6 R7: library part CMP-1012-00122-1, "100K 0.1W 5% 0603 (1608 Metric)  SMD", Case-EIA=0603, Case-Metric=1608, Power="0.1 W", Tolerance="5 %", Technology=SMT
R2 R5: library part CMP-1012-00074-1, "1K 0.1W 5% 0603 (1608 Metric)  SMD", Case-EIA=0603, Case-Metric=1608, Power="0.1 W", Tolerance="5 %", Technology=SMT
R3: library part CMP-2000-06957-1, "Chip Resistor, 2.2 KOhm, +/- 5%, 0.1 W, -55 to 155 degC, 0603 (1608 Metric), RoHS, Tape and Reel", Case Code - in=0603, Case Code - mm=1608, Manufacturer=Yageo, Operating Temperature Range=-55Cto+155C, Package Description="2-Pin Surface Mount Device, Body 1.6 x 0.8 mm", Power Rating=100mW, Resistance=2.2kOhms, Temperature Coefficient=100PPM/C, Tolerance=5%, Voltage Rating=50V, Datasheet URL=http://www.yageo.com/documents/recent/PYu-RC_Group_51_RoHS_L_7.pdf, Datasheet Version="Rev. 7, 05/2017", Manufacturer URL=http://www.yageo.com/, Mounting Technology=SurfaceMount, Package Reference=0603, Packaging=Reel, Product=ThickFilmResistorsGeneralPurpose, Series=RC, Termination Style=SMD/SMT
R4: library part CMP-1012-00098-1, "10K 0.1W 5% 0603 (1608 Metric)  SMD", Case-EIA=0603, Case-Metric=1608, Power="0.1 W", Tolerance="5 %", Technology=SMT
R8 R9 R10: library part CMP-1012-00090-1, "4K7 0.1W 5% 0603 (1608 Metric)  SMD", Case-EIA=0603, Case-Metric=1608, Power="0.1 W", Tolerance="5 %", Technology=SMT
SW1: library part SW-SPDT, "SWITCH SPDT PCB"
SW2: library part CMP-2000-06516-1, "Switch Tactile, SPST, 50 mA, 32 V, -40 to 85 degC, 4-Pin SMD, RoHS, Tape and Reel", Actuator Color=N/A, Contact Rating @ Voltage=1A, Dielectric Strength=>=250Vrms, Manufacturer="C&K Components", Maximum DC Voltage Rating=32V, Minimum Insulation Resistance=>=1000MOhm, Operating Force=3N, Operating Temperature=-40to85C, Package Description="4-Pin Surface Mount Device, Body 4.6 x 2.8 mm", Actuator Length=0.5mm, Actuator Style=Button, Base Material=N/A, Body Orientation=Straight, Contact Material=Silver, Contact Plating=Silver, Datasheet URL=http://www.ck-components.com/media/1479/kmr2.pdf, Datasheet Version=06/2016, Dimension=2.8x4.6x1.9mm, ECCN=EAR99, Electrical Life=N/A, Family=KMR2, Ground Terminal=Yes, Housing Material=N/A, HTS=8536501199, Illumination Type=N/R, Manufacturer URL=http://www.ckswitches.com/, Maximum AC Voltage Rating=N/A, Mechanical Life=150000Cycles, Mounting=SurfaceMount,GullWing, Mounting Technology=SurfaceMount, Package Reference=KMR231GLFS, Packaging=TapeandReel, Part No=KMR231GLFS, Pole Throw Configuration=SPST, Product Weight=N/A, RoHS=Yes, Seal Description=N/A, Seal Location=N/A, Supplier=C&KComponents, Switch Configuration=N.O., Type=Micro-Miniature
TP1 TP2: library part CMP-2000-05183-1, "Test Point, White, SMT", Manufacturer=Keystone, Contact Plating=Silver, Datasheet URL=https://datasheet.ciiva.com/1123/5015-1123862.pdf, Datasheet Version=Mar-14, Finish Plating=SilverPlate, Height=0.06In., Manufacturer URL=http://www.keyelco.com/, Material=PhosphorBronze, Material, Contact=PhosphorBronze, Mounting=SurfaceMount, Mounting Type=SurfaceMount, Primary Type=PCBTestPoints, Style=Miniature, Termination=SMT, Thickness=0.010In., Type=TestPointsonTapeandReel
U1: library part CMP-2100-03585-1, "SMART ARM-Based Microcontroller, 1.62 to 3.63 V, 256 KB Flash, 32 KB SRAM, -40 to 85 degC, 48-Pin TQFP, RoHS, Tray", Case/Package=TQFP, Frequency=48MHz, Manufacturer=Atmel, Max Operating Temperature=85degC, Max Supply Voltage=3.63V, Min Operating Temperature=-40degC, Min Supply Voltage=1.62V, Package Description="48-Pin Thin Profile Plastic Quad Flat Package, Body 7 x 7 mm, Pitch 0.5 mm", Package Reference=TQFP48, Contact Plating=Tin, Datasheet URL=http://www.atmel.com/images/atmel-42181-sam-d21_datasheet.pdf, Datasheet Version="Rev. N, 10/2016", Lead Free=LeadFree, Manufacturer URL=http://www.atmel.com/, Max Frequency=48MHz, Mount=SurfaceMount, Number of Pins=48, Number of Timers/Counters=6, Packaging=Tray, REACH SVHC=NoSVHC, RoHSCompliant=true
U2: "IC REG LINEAR 3.3V 500MA SOT23-5"
U3: library part CMP-0133-00143-1, "Miniature Single-Cell, Fully Integrated Li-Ion, Li-Polymer Charge Management Controller, 4.2V, 5-Pin SOT-23, Industrial Temperature, Tape and Reel", Code_IPC=SOT23-5, DatasheetVersion="revE, Sep-2008", PackageDescription="5-Lead Plastic Small Outline Transistor (OT) [SOT-23]", PackageReference=SOT-23-OT5, PackageVersion="revBB, Aug-2009"
U4: "IC LED DRVR MATRIX 28TSSOP"
U5: "MIC MEMS DIGITAL PDM OMNI -26DB"
X1: "XTAL 32.768KHZ 12.5PF SMD"

## Free pads (board coordinates)
  round 0 hole 2 unplated: MH(-37.5,0) MH(-18.75,-32.476) MH(-18.75,32.476) MH(18.75,-32.476) MH(18.75,32.476) MH(37.5,0)
  round 0 hole 3.4 unplated: MH(-21.651,-12.5) MH(-21.651,12.5) MH(21.651,12.5) MH(21.651,-12.5)

## Via types
v1: diameter 0.762, hole 0.381, Component Side to Bottom Layer, tented both sides, 234 vias

## Nets (pads, with @x,y where several pads share a name; then routed paths per layer and width w, separated by ;. In a path a pad name is that pad's centre, name@x,y a point inside that pad or via, vN(x,y) a via of type N, cw(c..) or ccw(c..) an arc to the next point about the centre after c; other vN are vias at no path point)
3V3: C3.2 C4.2 C5.2 C9.2 C10.2 J3.2 R8.2 R9.2 U1.6 U1.17 U1.36 U1.44 U2.5 U4.3 U4.10 U4.18 U4.19 U4.26 U5.1 U5.2 | length 113.7
  Component Side w0.2: U5.2@-1.05,-14.75 -1.05,-14.5 -0.3,-13.75 -0.3,-13.6 ; v1(9.775,6.225) 10.951,6.225 11.526,6.8 12.9,6.8 R9.2@13.7,6 R8.2@13.7,4.2
  Component Side w0.3: U5.1@-1.05,-16.1 U5.2@-1.05,-14.75 ; v1(-0.3,-9.5) U1.36@-0.3,-8.75 ; v1(4.4,0.4) 4.4,0.275 4.75,-0.075 U1.17@4.75,-1.7 ; U1.44@4.75,-10.3 v1(4.75,-9.05) ; U1.6@8.3,-6.25 11.4,-6.25 12,-5.65 C5.2@12,-5.5 12.425,-5.075 12.425,-4.6 12.7,-4.325 v1(12.7,-4.2)
  Component Side w0.4: U4.10@0.8,6.875 2.325,6.875 ; U4.3@0.8,11.425 0.825,11.45 2.034,11.45 2.084,11.5 2.209,11.375 2.259,11.426 v1(2.3,11.426) ; v1(5.825,6.875) U4.19@7.7,6.875 ; U4.18@7.7,6.225 v1(9.775,6.225) ; U4.26@7.7,11.425 9.2,11.425
  Component Side w0.5: -0.3,-13.6 -0.3,-12.496 -0.641,-12.155 -0.641,-11.045 -0.3,-10.704 v1(-0.3,-9.5) ; 2.325,6.875 v1(2.6,6.6) ; v1(4.4,0.4) 4.37,0.4 2.95,1.82 2.95,6.25 v1(2.6,6.6) ; v1(5.825,6.875) 5.55,6.6 v1(2.6,6.6) ; 9.2,11.425 11.475,11.425 C10.2@12.2,10.7 C9.2@14.5,10.7 ; C9.2@14.5,10.7 v1(16.1,10.7)
  Component Side w0.6: J3.2@-15.74,-12.4 -15.3,-12.4 -11.55,-8.65 U2.5@-11.55,-7.825 ; U2.5@-11.5,-7.873 -10.223,-7.873 C3.2@-9.6,-7.25
  Component Side w0.75: C3.2@-9.6,-7.3 -8.55,-8.35 v1(-8.45,-8.35) C4.2@-7.4,-7.3
  Bottom Layer w0.5: v1(2.3,11.426) v1@2.374,11.426 ; v1@2.395,11.456 2.4,11.451 v1@2.374,11.426 ; v1@2.6,6.5 v1(2.6,6.6) 2.6,11.2 v1@2.374,11.426 ; v1@5.8,6.9 v1(5.825,6.875) 9.125,6.875 v1(9.775,6.225) ; v1@9.8,6.2 v1(9.775,6.225) ; v1(16.1,10.7) 14.4,10.7 9.925,6.225 v1(9.775,6.225)
  Bottom Layer w0.75: v1(-8.45,-8.35) -5.05,-8.35 -3.9,-9.5 v1(-0.3,-9.5) 4.297,-9.5 4.747,-9.05 v1(4.75,-9.05) 5.034,-8.766 5.034,-4 5.975,-3.06 5.975,-1.175 v1(4.4,0.4) ; v1@4.756,-9.048 4.756,-9.05 7.85,-9.05 v1(12.7,-4.2)
A0: J4.3 U1.3 | length 16.3
  Component Side w0.3: U1.3@8.3,-7.75 9.65,-7.75 11.7,-9.8 14.602,-9.8 18,-6.402 18,-3.79 J4.3@19.25,-2.54
A1: J4.4 U1.7 | length 9.7
  Component Side w0.3: U1.7@8.3,-5.75 8.95,-5.75 9.955,-5.75 13.165,-2.54 J4.4@16.71,-2.54
A2: J4.5 U1.8 | length 13.1
  Component Side w0.3: U1.8@8.3,-5.25 9.748,-5.25 13.558,-1.44 17.81,-1.44 J4.5@19.25,0
A3: J4.6 U1.9 | length 10.4
  Component Side w0.3: U1.9@8.3,-4.75 8.95,-4.75 9.541,-4.75 14.291,0 J4.6@16.71,0
A4: J4.7 U1.10 | length 13.8
  Component Side w0.3: U1.10@8.3,-4.25 9.334,-4.25 14.684,1.1 17.81,1.1 J4.7@19.25,2.54
A5: J4.8 U1.47 | length 21
  Component Side w0.3: U1.47@6.25,-10.3 6.25,-11.225 6.391,-11.365 6.391,-11.99 6.6,-12.2 v1(6.7,-12.2)
  Bottom Layer w0.3: v1(6.7,-12.2) 6.7,-11.25 15.1,-2.85 15.1,0.93 J4.8@16.71,2.54
AREF: C6.2 J4.2 U1.4 | length 12
  Component Side w0.3: U1.4@8.3,-7.25 8.95,-7.25 10.95,-7.25 C6.2@12,-8.3 12.9,-9.2 14.495,-9.2 16.71,-6.985 J4.2@16.71,-5.08
ARESETN: J3.1 SW2.1 SW2.2 U1.40 | length 27.6
  Component Side w0.25: J3.1@-15.74,-14.94 -15.74,-15.66 -14.7,-16.7 -5.6,-16.7 -3.385,-18.915 -0.616,-18.915 1.41,-16.89 2.05,-16.89 SW2.1@2.05,-15.3 2.05,-12.029 2.725,-11.354 2.725,-10.325 U1.40@2.75,-10.3
AUXCOM0: J3.9 U1.21 | length 25.5
  Component Side w0.25: J3.9@-5.58,-14.94 -6.655,-13.865 -6.655,-10.377 -4.541,-8.263 -4.541,-4.51 -4.435,-4.404 -4.435,-3.377 -4.615,-3.196 -4.615,-0.415 -3.598,0.602 v1(-3.51,0.602) ; v1(-0.7,0.5) 1.7,0.5 2.74,-0.54 2.74,-1.69 U1.21@2.75,-1.7
  Bottom Layer w0.25: v1(-3.51,0.602) -3.346,0.765 -0.965,0.765 v1(-0.7,0.5)
AUXCOM1: J3.10 U1.22 | length 20.9
  Component Side w0.25: J3.10@-5.58,-12.4 -5.58,-9.939 -4.091,-8.449 -4.091,-4.697 -3.965,-4.571 -3.965,-3.21 -3.998,-3.177 -3.998,-0.898 v1(-3.9,-0.8) ; v1(-0.649,-0.471) -0.649,-0.461 -0.188,0 1.564,0 2.24,-0.677 2.24,-1.69 U1.22@2.25,-1.7
  Bottom Layer w0.25: v1@-4.1,-0.643 v1@-3.943,-0.8 ; v1(-0.649,-0.471) -0.683,-0.471 -0.712,-0.5 -1.312,0.1 -3,0.1 v1(-3.9,-0.8) ; v1@-3.943,-0.8 v1(-3.9,-0.8) ; v1@-3.943,-0.8 -3.922,-0.822 v1(-3.9,-0.8)
BATSENSE: R6.1 R7.2 U1.28 | length 15
  Component Side w0.2: R7.2@-8.5,1 -7.825,1 v1(-6.35,-0.475) ; R6.1@-8.5,2.85 R6.1@-8.5,2.9 ; v1(-2.625,-1.65) -2.625,-1.784 -3.04,-2.199 -3.04,-4.214 -2.504,-4.75 U1.28@-0.3,-4.75
  Component Side w0.254: R7.2@-8.5,1 R6.1@-8.5,2.85
  Bottom Layer w0.2: v1(-6.35,-0.475) -5.202,-0.475 -4.201,-1.476 -4.186,-1.49 -3.614,-1.49 -3.273,-1.15 -2.875,-1.15 -2.625,-1.4 v1(-2.625,-1.65)
CS0: LD1_1.1 LD2_1.1 LD3_1.1 LD4_1.2 LD4_2.1 LD4_3.1 LD4_4.1 LD4_5.1 LD4_6.1 LD4_7.1 LD4_8.1 LD4_9.1 LD4_10.1 LD4_11.1 LD4_12.1 LD5_1.2 U4.25 | length 324.6
  Component Side w0.25: LD4_9.1@-36.179,3.336 -35.486,2.936 v1(-33.847,3.376) -27.204,5.156 -25.659,7.832 -24.1,8.25 -20.337,9.258 -15.953,16.852 -14.055,17.361 v1(-12.07,20.798) -11.386,21.193 -11.25,21.7 -15.151,28.456 -14.821,29.686 -16.5,32.625 -16.5,33.562 -15.8,34.262 -13.1,34.262 -12.838,34 -12.8,34 ; LD4_11.1@-20.979,-29.664 -20.235,-29.234 -19.806,-27.635 v1@-19.8,-27.612 ; v1@-19.856,-27.627 v1(-19.847,-27.624) -16.35,-26.687 -12.981,-20.852 -12.295,-20.668 v1(-11.976,-20.852) 3.852,-20.852 v1(14,-31) 15.2,-32.2 LD4_7.1@15.2,-33 ; v1(-11.7,32.1) -12.6,33 LD4_1.2@-12.8,33 -12.8,34 ; LD1_1.1@-5.6,32.5 -5.6,33.962 ; LD2_1.1@1.4,32.5 1.4,33.962 ; U4.25@7.7,10.775 6.671,10.775 6.571,10.875 6.497,10.875 5.725,11.647 5.725,14.325 11.976,20.576 v1(11.976,20.852) ; LD3_1.1@8.4,32.5 8.4,33.962 ; v1(12.07,-20.798) 19.984,-7.09 v1(33.847,-3.376) 35.486,-2.936 LD4_5.1@36.179,-3.336 ; LD5_1.2@15.2,33 15.2,34 14.938,34.262 8.7,34.262 8.4,33.962 ; LD4_3.1@20.979,29.664 20.286,29.264 v1(19.847,27.624) 16.132,13.762 v1(24.046,0.054) ; -12.8,34 -12.538,34.262 -5.9,34.262 -5.6,33.962 ; -5.6,33.962 -5.3,34.262 1.1,34.262 1.4,33.962 ; 1.4,33.962 1.7,34.262 8.1,34.262 8.4,33.962
  Bottom Layer w0.25: LD4_12.1@-34.979,5.415 -34.286,5.015 v1(-33.847,3.376) ; LD4_10.1@-22.179,-27.585 -21.486,-27.185 v1(-19.847,-27.624) ; LD4_2.1@-12.8,33 -12.6,33 v1(-11.7,32.1) ; v1(-12.07,20.798) -12.016,20.852 v1(11.976,20.852) ; v1(-11.976,-20.852) 12.016,-20.852 v1(12.07,-20.798) 24.066,-0.02 v1(24.046,0.054) v1@12.05,20.832 ; LD4_8.1@12.8,-33 12.8,-32.2 v1(14,-31) ; v1(19.847,27.624) 21.486,27.185 LD4_4.1@22.179,27.585 ; v1(33.847,-3.376) 34.286,-5.015 LD4_6.1@34.979,-5.415
CS1: LD1_2.1 LD1_3.4 LD1_4.4 LD1_5.4 LD1_6.4 LD1_7.4 LD1_8.4 LD1_9.4 LD1_10.4 LD1_11.4 LD1_12.4 LD2_2.1 LD3_2.1 LD4_1.1 LD4_2.2 LD5_2.2 U4.27 | length 330
  Component Side w0.25: LD1_9.4@-32.346,8.975 v1(-31.047,8.225) -29.513,7.34 -20.63,9.72 -16.25,17.306 -14.848,17.682 v1(-12.56,21.646) ; LD1_11.4@-23.946,-23.525 v1(-22.647,-22.775) -19.8,-23.537 v1(-13.551,-19.929) ; LD4_1.1@-15.2,33 v1(-13.5,31.3) -9.675,31.3 -9.116,30.74 -9.116,30.704 -0.112,21.7 v1(12.466,21.7) 12.466,21.562 12.692,21.336 12.692,20.556 6.175,14.039 6.175,12.497 6.497,12.175 6.647,12.175 6.721,12.175 6.821,12.075 U4.27@7.7,12.075 ; v1(-12.466,-21.7) 2,-21.7 8.4,-28.1 LD1_7.4@8.4,-32.5 ; v1(12.56,-21.646) 19.361,-9.866 29.283,-7.207 v1(31.047,-8.225) LD1_5.4@32.346,-8.975 ; LD1_3.4@23.946,23.525 23.3,23.1 v1(22.647,22.775) 20.883,21.756 18.225,11.834 v1(25.026,0.054)
  Bottom Layer w0.25: v1(-31.047,8.225) -30.873,8.125 -29.723,10.117 -29.906,10.8 LD1_12.4@-30.946,11.4 ; LD1_10.4@-25.346,-21.1 -24.307,-20.5 -23.624,-20.683 -22.474,-22.675 v1(-22.647,-22.775) ; v1(-13.551,-19.929) v1@-12.56,-21.646 ; v1(-13.5,31.3) LD4_2.2@-15.2,33 -15.2,34 -14.938,34.262 -8.7,34.262 -8.4,33.962 ; v1(-12.56,21.646) -12.506,21.7 v1(12.466,21.7) 17.895,12.297 17.814,11.995 19.295,9.43 19.671,9.329 v1(25.026,0.054) 19.597,-9.349 19.295,-9.43 17.814,-11.995 17.915,-12.371 v1(12.56,-21.646) ; v1(-12.466,-21.7) v1@12.506,-21.7 ; LD1_2.1@-8.4,32.5 -8.4,33.962 ; LD2_2.1@-1.4,32.5 -1.4,33.962 ; LD1_8.4@5.6,-32.5 5.6,-31.3 6.1,-30.8 8.4,-30.8 v1(8.4,-31) ; LD3_2.1@5.6,32.5 5.6,33.962 ; LD5_2.2@12.8,33 12.8,34 12.538,34.262 5.9,34.262 5.6,33.962 ; v1(22.647,22.775) 22.474,22.675 23.624,20.683 24.307,20.5 LD1_4.4@25.346,21.1 ; LD1_6.4@30.946,-11.4 29.907,-10.8 29.724,-10.117 30.874,-8.125 v1(31.047,-8.225) ; -8.4,33.962 -8.1,34.262 -1.7,34.262 -1.4,33.962 ; -1.4,33.962 -1.1,34.262 5.3,34.262 5.6,33.962
CS2: LD1_1.4 LD1_2.4 LD1_3.1 LD1_4.3 LD1_5.3 LD1_6.3 LD1_7.3 LD1_8.3 LD1_9.3 LD1_10.3 LD1_11.3 LD1_12.3 LD2_3.1 LD3_3.1 LD4_3.2 LD5_3.2 U4.23 | length 311
  Component Side w0.25: v1(-32.112,10.573) -31.911,9.821 LD1_9.3@-31.589,9.636 -30.942,9.262 -30.112,8.782 -25.877,9.917 -22.211,16.268 -15.626,18.032 v1(-13.05,22.494) ; v1(-25.212,-22.524) -24.75,-22.85 LD1_11.3@-24.139,-22.539 -22.801,-21.767 -20.923,-22.27 v1(-15.096,-18.906) ; v1(-12.956,-22.549) 1.749,-22.549 7.45,-28.25 LD1_7.3@7.45,-32.175 7.45,-32.546 v1(6.9,-33.096) ; LD1_1.4@-8.4,32.831 v1(-8.4,31) -8.4,30.661 -0.287,22.549 v1(12.956,22.549) 13.274,22.365 13.961,22.549 17.913,29.395 20.816,31.07 21.772,30.814 23.122,28.476 23.026,28.118 ; v1(7.1,13.9) 13.181,19.981 13.181,22.184 ; U4.23@7.7,9.475 9.275,9.475 v1(9.5,9.7) ; v1(13.05,-22.494) 18.862,-12.428 18.771,-12.088 19.862,-10.197 28.537,-7.873 LD1_5.3@31.589,-9.636 31.911,-9.821 v1(32.112,-10.573) ; LD4_3.2@22.179,27.585 23.045,28.085 23.403,27.989 26.722,22.241 26.612,21.831 ; v1(25.212,22.524) 25.6,22.136 25.6,21.354 LD1_3.1@25.346,21.1 26.612,21.831 ; LD2_3.1@28.846,15.038 30.112,15.769 ; LD3_3.1@32.346,8.975 33.612,9.706 ; LD5_3.2@36.179,3.336 37.045,3.836 37.141,4.194 34.022,9.597 33.612,9.706 ; 26.612,21.831 27.022,21.721 30.222,16.178 30.112,15.769 ; 30.112,15.769 30.522,15.659 33.722,10.116 33.612,9.706
  Bottom Layer w0.25: v1(-32.112,10.573) -32.115,10.574 -32.113,10.575 -31.637,10.703 LD1_12.3@-31.139,10.415 ; v1(-25.212,-22.524) -25.215,-22.526 -25.215,-22.523 -25.087,-22.047 LD1_10.3@-24.589,-21.76 ; v1@-14.989,-19.136 -14.836,-19.4 ; v1@-13.05,-22.494 -14.836,-19.4 ; v1(-13.05,22.494) -12.995,22.549 v1(12.956,22.549) 18.524,12.904 18.297,12.058 19.591,9.816 20.512,9.57 v1(26.005,0.054) 20.437,-9.59 19.591,-9.816 18.297,-12.058 18.544,-12.979 v1(13.05,-22.494) ; v1(-12.956,-22.549) v1@12.995,-22.549 ; v1(-8.4,31) -7.986,30.586 -6.764,30.586 -5.6,31.75 LD1_2.4@-5.6,32.5 ; LD1_8.3@6.55,-32.175 6.55,-32.75 6.9,-33.1 v1(6.9,-33.096) ; v1(7.1,13.9) 9,12 9,10.2 v1(9.5,9.7) ; LD1_4.3@24.589,21.76 25.087,22.047 25.215,22.523 25.215,22.526 v1(25.212,22.524) ; LD1_6.3@31.139,-10.415 31.637,-10.703 32.113,-10.575 32.115,-10.574 v1(32.112,-10.573) ; v1(-15.096,-18.906) -15.1,-18.9 v1(-15.096,-18.906) ; v1(-15.096,-18.906) -14.836,-19.4